# EAGLE board Aquila-2018 (EAGLE 9.1.1), part 1 of 2
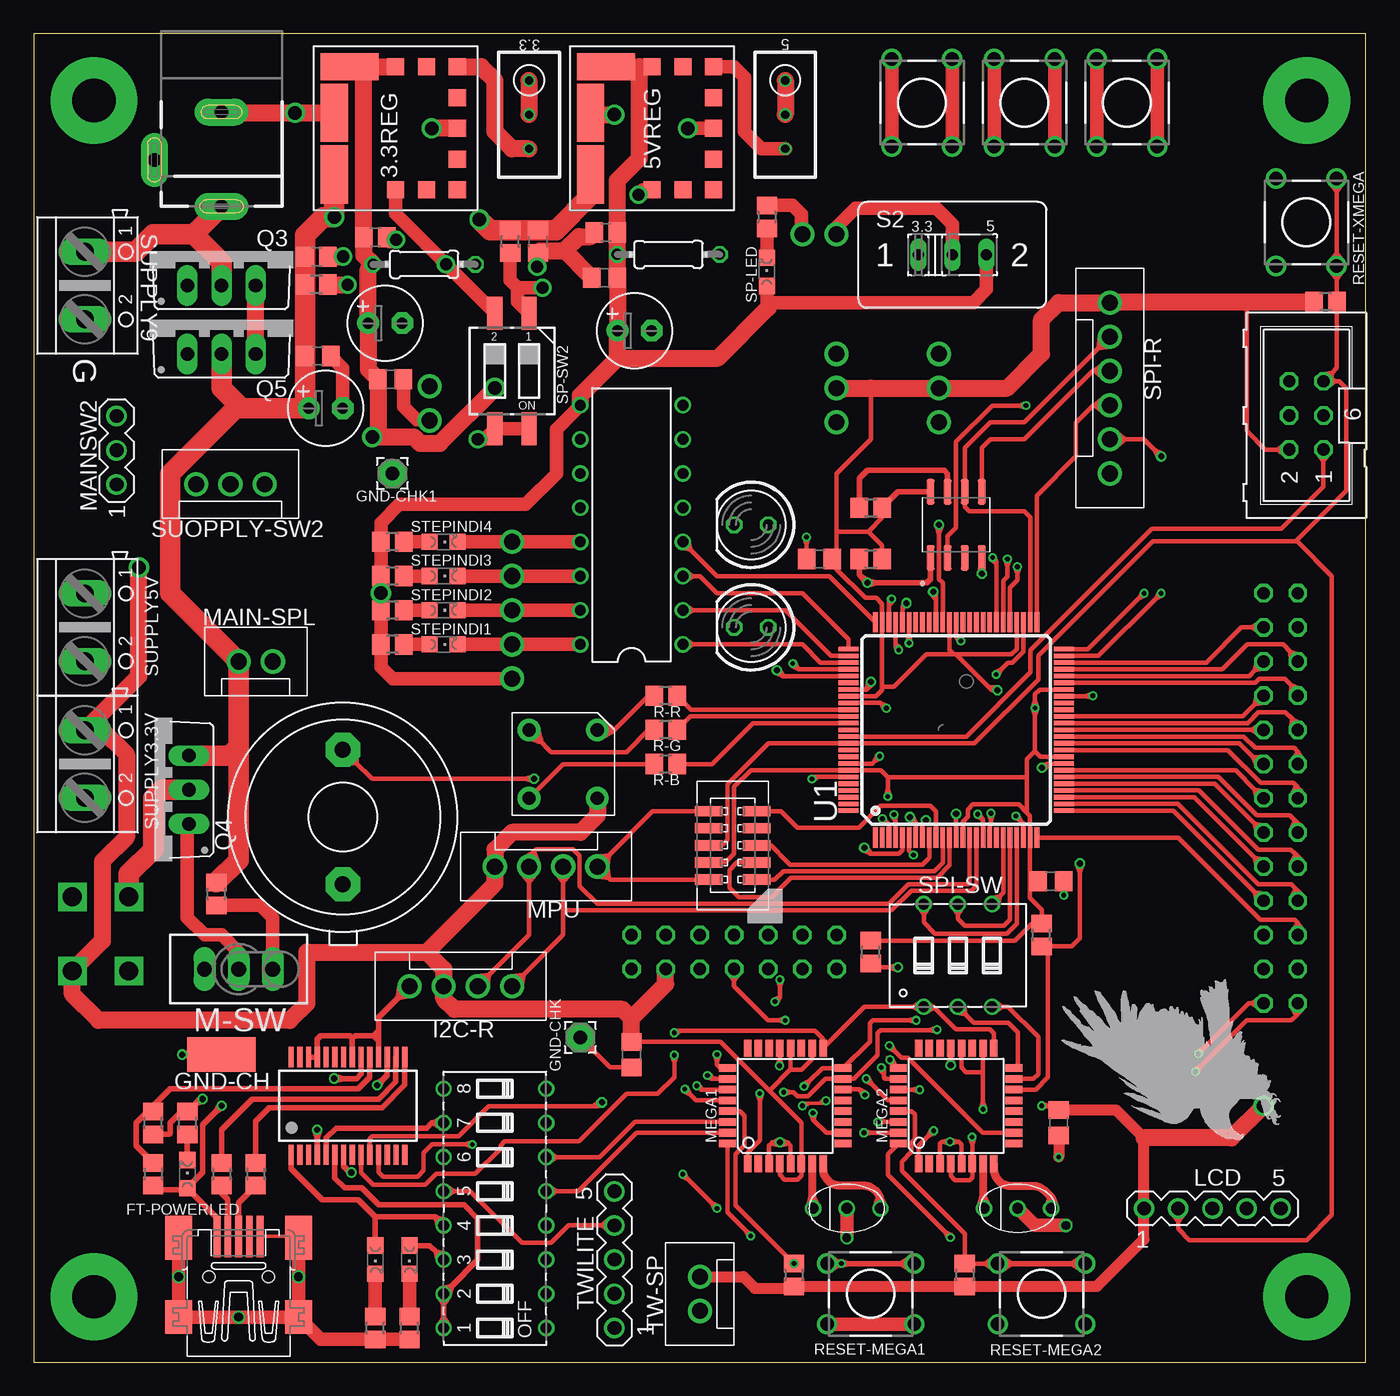
[diagram p0: board, top side]
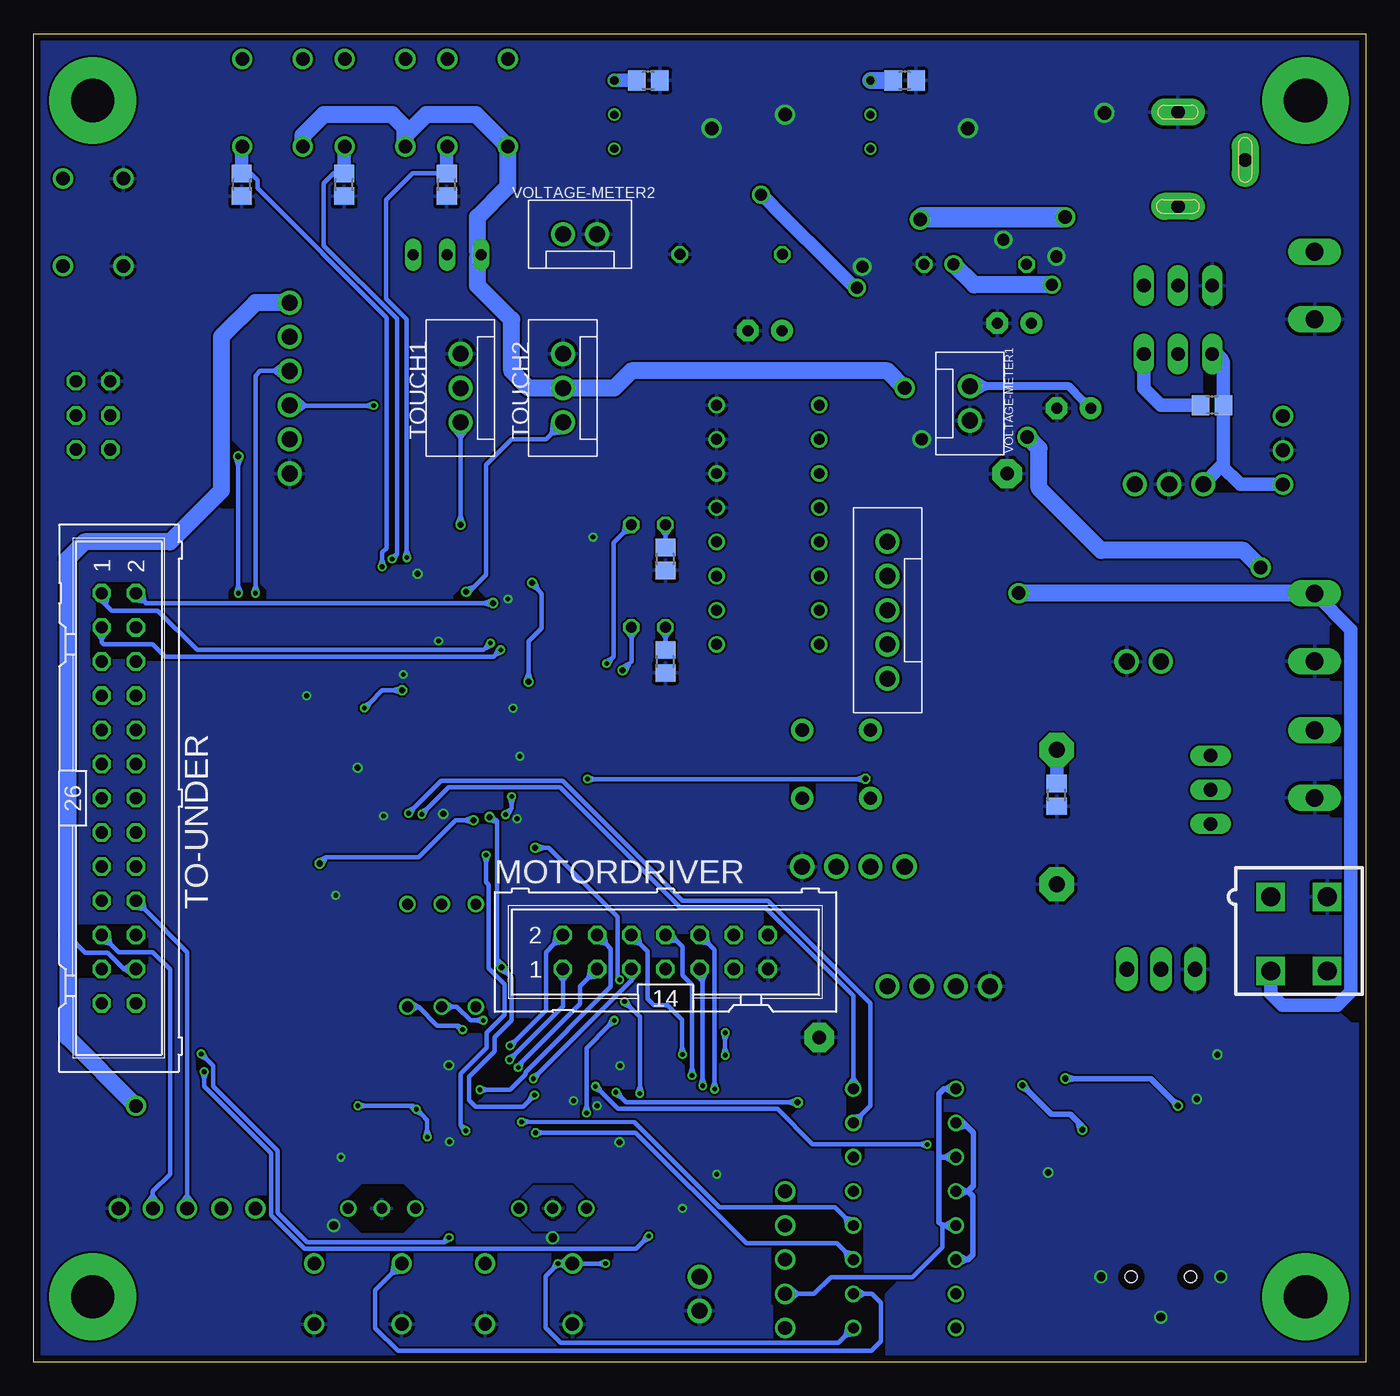
[diagram p1: board, bottom side, seen from below]

Size 99.04 x 98.73 mm. Coordinates in mm from the lower left corner, seen from the top.
Outline: 0,0 99.04,0 99.04,98.73 0,98.73 0,0
Copper layers (1*16): Top 0.035mm / dielectric 1.6mm / Bottom 0.035mm
Design rules "Elecrow_2-layer_PCB_eagle_rule": minimum track width 6mil, minimum drill 12mil, track to track 6mil, track to pad 6mil, pad to pad 6mil, via to via 8mil, smd to smd 0mil, copper to edge 20mil, drill to drill 10mil, minimum pad ring 6mil, minimum via ring 6mil, stop-mask expansion 0mil, vias tented up to drill 100mil, thermal gap 10mil
bRestrict: area 29.9,9.5 to 31.4,17.8; 243 lines

## Footprints (pad centres in the part's own frame; a part is rotated, then mirrored left to right if it is on the bottom)
E2,5-6 = drill 0.813 pad 1.6: + -1.27,0 | drill 0.813 pad 1.6 octagon: - 1.27,0
C0805 = smd 1.3 x 1.5: 1 -0.95,0; 2 0.95,0
OKL-T/3-W5 = smd 1.27 x 1.27: 1 -10.67,6.1; 5 -1.52,6.1; 6 -1.52,1.52; 7 -6.09,1.52; 8 -8.38,1.52; 9 -10.67,1.52; 10 -10.67,3.81; 11 -1.52,3.81; 12 -3.81,1.52 | smd 4.32 x 2.03: 2 -9.53,10.67; 3 -4.95,10.67 | smd 2.03 x 4.32: 4 -1.52,9.53
C2012 = smd 1.3 x 1.5: 1 -0.85,0; 2 0.85,0
OSTA71A1D-A = drill 1 pad 1.676: ANODE 2.54,2.54; BLUE 2.54,-2.54; GREEN -2.54,-2.54; RED -2.54,2.54
R0805 = smd 1.3 x 1.5: 1 -0.85,0; 2 0.85,0
32005-201 = smd 3.1 x 0.5: 1 3,1.6; 2 3,0.8; 3 3,0; 4 3,-0.8; 5 3,-1.6 | smd 2.5 x 2: M1 -3,-4.45; M2 -3,4.45 | smd 3.3 x 2: M3 2.9,4.45; M4 2.9,-4.45 | hole 0.9: 0,2.2; 0,-2.2
CHIPLED_0805 = smd 1.2 x 1.2: A 0,-1.05; C 0,1.05
SMD2,54-5,08 = smd 2.54 x 5.08: 1 0,0
2,15/1,0 = drill 1.016 pad 2.159 octagon: 1 0,0
CON4 = drill 1.2: P$1 -3.81,0; P$2 -1.27,0; P$3 1.27,0; P$4 3.81,0
SSOP28 = smd 0.4 x 1.5: 1 -4.225,-3.625; 2 -3.575,-3.625; 3 -2.925,-3.625; 4 -2.275,-3.625; 5 -1.625,-3.625; 6 -0.975,-3.625; 7 -0.325,-3.625; 8 0.325,-3.625; 9 0.975,-3.625; 10 1.625,-3.625; 11 2.275,-3.625; 12 2.925,-3.625; 13 3.575,-3.625; 14 4.225,-3.625; 15 4.225,3.625; 16 3.575,3.625; 17 2.925,3.625; 18 2.275,3.625; 19 1.625,3.625; 20 0.975,3.625; 21 0.325,3.625; 22 -0.325,3.625; 23 -0.975,3.625; 24 -1.625,3.625; 25 -2.275,3.625; 26 -2.925,3.625; 27 -3.575,3.625; 28 -4.225,3.625
DIL16 = drill 0.813: 1 -8.89,-3.81; 2 -6.35,-3.81; 3 -3.81,-3.81; 4 -1.27,-3.81; 5 1.27,-3.81; 6 3.81,-3.81; 7 6.35,-3.81; 8 8.89,-3.81; 9 8.89,3.81; 10 6.35,3.81; 11 3.81,3.81; 12 1.27,3.81; 13 -1.27,3.81; 14 -3.81,3.81; 15 -6.35,3.81; 16 -8.89,3.81
CON5 = drill 1.2: P$1 -5.08,0; P$2 -2.54,0; P$3 0,0; P$4 2.54,0; P$5 5.08,0
20021221-00010C4LF = smd 0.76 x 2.05: 1 -2.54,-1.78; 2 -2.54,1.78; 3 -1.27,-1.78; 4 -1.27,1.78; 5 0,-1.78; 6 0,1.78; 7 1.27,-1.78; 8 1.27,1.78; 9 2.54,-1.78; 10 2.54,1.78
LED5MM = drill 0.813 octagon: A -1.27,0; K 1.27,0
MA05-1 = drill 1.016: 1 -5.08,0; 2 -2.54,0; 3 0,0; 4 2.54,0; 5 5.08,0
TL3XPO = drill 1.1 pad 1.422 long: 1 -2.54,0; 2 0,0; 3 2.54,0
CON2 = drill 1.2: P$1 -1.27,0; P$2 1.27,0
MA03-1 = drill 1.016: 1 -2.54,0; 2 0,0; 3 2.54,0
TQFP32-08 = smd 1.27 x 0.559: 1 -4.293,2.8; 2 -4.293,2; 3 -4.293,1.2; 4 -4.293,0.4; 5 -4.293,-0.4; 6 -4.293,-1.2; 7 -4.293,-2; 8 -4.293,-2.8; 17 4.293,-2.8; 18 4.293,-2; 19 4.293,-1.2; 20 4.293,-0.4; 21 4.293,0.4; 22 4.293,1.2; 23 4.293,2; 24 4.293,2.8 | smd 0.559 x 1.27: 9 -2.8,-4.293; 10 -2,-4.293; 11 -1.2,-4.293; 12 -0.4,-4.293; 13 0.4,-4.293; 14 1.2,-4.293; 15 2,-4.293; 16 2.8,-4.293; 25 2.8,4.293; 26 2,4.293; 27 1.2,4.293; 28 0.4,4.293; 29 -0.4,4.293; 30 -1.2,4.293; 31 -2,4.293; 32 -2.8,4.293
ML14 = drill 0.914 octagon: 1 -7.62,-1.27; 2 -7.62,1.27; 3 -5.08,-1.27; 4 -5.08,1.27; 5 -2.54,-1.27; 6 -2.54,1.27; 7 0,-1.27; 8 0,1.27; 9 2.54,-1.27; 10 2.54,1.27; 11 5.08,-1.27; 12 5.08,1.27; 13 7.62,-1.27; 14 7.62,1.27
CSTLS_X = drill 0.813: 1 -2.5,0; 2 0,0; 3 2.5,0
TO220BV = drill 1.016 long: D 0,-2.54; G -2.54,-2.54; S 2.54,-2.54
0204/7 = drill 0.813 octagon: 1 -3.81,0; 2 3.81,0
DTS-6 = drill 1: 1 -3.25,2.25; 2 3.25,2.25; 3 -3.25,-2.25; 4 3.25,-2.25
DIP08S = drill 0.813: 1 -8.89,-3.81; 2 -6.35,-3.81; 3 -3.81,-3.81; 4 -1.27,-3.81; 5 1.27,-3.81; 6 3.81,-3.81; 7 6.35,-3.81; 8 8.89,-3.81; 9 8.89,3.81; 10 6.35,3.81; 11 3.81,3.81; 12 1.27,3.81; 13 -1.27,3.81; 14 -3.81,3.81; 15 -6.35,3.81; 16 -8.89,3.81
M251 = drill 0.813 long: 1 -2.54,0; 2 0,0; 3 2.54,0
F/EE17P = drill 1.194 pad 2.54 octagon: 1 -5.004,0; 2 5.004,0
RTRIM3296W = drill 0.61: 1 0,-2.54; 2 0,0; 3 0,2.54
CTS-219-02 = smd 1.13 x 2.44: 1 -1.27,-4.3; 2 1.27,-4.3; 3 1.27,4.3; 4 -1.27,4.3
CON6 = drill 1.2: P$1 -6.35,0; P$2 -3.81,0; P$3 -1.27,0; P$4 1.27,0; P$5 3.81,0; P$6 6.35,0
DIP03YL = drill 0.813: 1 -2.54,-3.81; 2 0,-3.81; 3 2.54,-3.81; 4 2.54,3.81; 5 0,3.81; 6 -2.54,3.81
CON3 = drill 1.2: P$1 -2.54,0; P$2 0,0; P$3 2.54,0
AK500/2 = drill 1.321 long: 1 -2.515,0; 2 2.515,0
ML6 = drill 0.914 octagon: 1 -2.54,-1.27; 2 -2.54,1.27; 3 0,-1.27; 4 0,1.27; 5 2.54,-1.27; 6 2.54,1.27
ML26 = drill 0.914 octagon: 1 -15.24,-1.27; 2 -15.24,1.27; 3 -12.7,-1.27; 4 -12.7,1.27; 5 -10.16,-1.27; 6 -10.16,1.27; 7 -7.62,-1.27; 8 -7.62,1.27; 9 -5.08,-1.27; 10 -5.08,1.27; 11 -2.54,-1.27; 12 -2.54,1.27; 13 0,-1.27; 14 0,1.27; 15 2.54,-1.27; 16 2.54,1.27; 17 5.08,-1.27; 18 5.08,1.27; 19 7.62,-1.27; 20 7.62,1.27; 21 10.16,-1.27; 22 10.16,1.27; 23 12.7,-1.27; 24 12.7,1.27; 25 15.24,-1.27; 26 15.24,1.27
TQFP-100A-100 = smd 1.5 x 0.35: 1 -8,6; 2 -8,5.5; 3 -8,5; 4 -8,4.5; 5 -8,4; 6 -8,3.5; 7 -8,3; 8 -8,2.5; 9 -8,2; 10 -8,1.5; 11 -8,1; 12 -8,0.5; 13 -8,0; 14 -8,-0.5; 15 -8,-1; 16 -8,-1.5; 17 -8,-2; 18 -8,-2.5; 19 -8,-3; 20 -8,-3.5; 21 -8,-4; 22 -8,-4.5; 23 -8,-5; 24 -8,-5.5; 25 -8,-6; 51 8,-6; 52 8,-5.5; 53 8,-5; 54 8,-4.5; 55 8,-4; 56 8,-3.5; 57 8,-3; 58 8,-2.5; 59 8,-2; 60 8,-1.5; 61 8,-1; 62 8,-0.5; 63 8,0; 64 8,0.5; 65 8,1; 66 8,1.5; 67 8,2; 68 8,2.5; 69 8,3; 70 8,3.5; 71 8,4; 72 8,4.5; 73 8,5; 74 8,5.5; 75 8,6 | smd 0.35 x 1.5: 26 -6,-8; 27 -5.5,-8; 28 -5,-8; 29 -4.5,-8; 30 -4,-8; 31 -3.5,-8; 32 -3,-8; 33 -2.5,-8; 34 -2,-8; 35 -1.5,-8; 36 -1,-8; 37 -0.5,-8; 38 0,-8; 39 0.5,-8; 40 1,-8; 41 1.5,-8; 42 2,-8; 43 2.5,-8; 44 3,-8; 45 3.5,-8; 46 4,-8; 47 4.5,-8; 48 5,-8; 49 5.5,-8; 50 6,-8; 76 6,8; 77 5.5,8; 78 5,8; 79 4.5,8; 80 4,8; 81 3.5,8; 82 3,8; 83 2.5,8; 84 2,8; 85 1.5,8; 86 1,8; 87 0.5,8; 88 0,8; 89 -0.5,8; 90 -1,8; 91 -1.5,8; 92 -2,8; 93 -2.5,8; 94 -3,8; 95 -3.5,8; 96 -4,8; 97 -4.5,8; 98 -5,8; 99 -5.5,8; 100 -6,8
SOIC127P600X175-8N = smd 1.91 x 0.6: 1 -2.46,1.905; 2 -2.46,0.635; 3 -2.46,-0.635; 4 -2.46,-1.905; 5 2.46,-1.905; 6 2.46,-0.635; 7 2.46,0.635; 8 2.46,1.905
5566-04A = drill 1.4 square: 1 2.1,-2.75; 2 -2.1,-2.75; 3 2.1,2.75; 4 -2.1,2.75
MJ-179P = drill 1 pad 2 long: 1 3,0; 2 -4,0; 3 -0.45,-5

## Placement (x,y rotation side)
3.3C1  100u  [E2,5-6]  26.14,77.22 0 top
3.3C2  0.1u  [C0805]  26.54,73.05 0 top
3.3REG  OKL-T_6-W12N-C  [OKL-T/3-W5]  33.02,97.79 90 top
5C1  100u  [E2,5-6]  44.68,76.66 0 top
5C2  0.1u  [C0805]  42.44,80.59 180 top
5VREG  OKL-T_6-W12N-C  [OKL-T/3-W5]  52.07,97.79 90 top
9C1  100u  [E2,5-6]  21.72,70.89 0 top
9C2  0.1u  [C0805]  21.13,74.78 0 top
C1  22uF25V  [C2012]  37.49,83.29 270 top
C2  10uF10V  [C2012]  42.55,83.95 180 top
C3  22uF25V  [C2012]  21.03,82.14 0 top
C4  10uF10V  [C2012]  25.4,83.59 0 top
CHECKLED  OSTA71A1D-A  [OSTA71A1D-A]  39.37,44.45 270 top
ERROR1-R  330  [R0805]  52.07,59.69 90 bottom
ERROR2-R  330  [R0805]  52.07,52.07 90 bottom
FT232-R8  330  [R0805]  25.4,2.54 90 top
FT232-R9  330  [R0805]  27.94,2.54 90 top
FT232-R10  4.7K  [R0805]  8.89,13.97 270 top
FT232-R11  10K  [R0805]  8.89,17.78 90 top
FT232-R12  1K  [R0805]  11.43,17.78 270 top
FT232-R13  23  [R0805]  16.51,13.97 270 top
FT232-R14  23  [R0805]  13.97,13.97 270 top
FT232USBCON  Wrie-USB  [32005-201]  15.24,6.35 90 top
FT-POWERLED  [CHIPLED_0805]  11.43,13.97 0 top
GND-CH  [SMD2,54-5,08]  13.97,22.86 90 top
GND-CHK  [2,15/1,0]  40.64,24.13 0 top
GND-CHK1  [2,15/1,0]  26.67,66.04 0 top
I2C-R  XH-4  [CON4]  31.75,27.94 180 top
IC1  FT232RL  [SSOP28]  23.37,19.05 0 top
IC2  ULN2003AN  [DIL16]  44.45,62.23 90 top
INDILED1  330  [R0805]  26.67,53.34 180 top
INDILED2  330  [R0805]  26.67,55.88 180 top
INDILED3  330  [R0805]  26.67,58.42 180 top
INDILED4  330  [R0805]  26.67,60.96 180 top
J1  XH-5  [CON5]  35.56,55.88 90 bottom
JTAG  [20021221-00010C4LF]  51.97,38.4 90 top
L3  E1  [LED5MM]  53.34,62.23 180 top
L4  E2  [LED5MM]  53.34,54.61 180 top
L5  RXDLED  [CHIPLED_0805]  27.94,7.62 180 top
L6  TXDLED  [CHIPLED_0805]  25.4,7.62 180 top
LCD  C2  [MA05-1]  87.63,11.43 0 top
M1-R1  4.7K  [R0805]  56.52,6.48 270 top
M2-R1  4.7K  [R0805]  69.22,6.48 270 top
M-SW  TL36PO  [TL3XPO]  15.24,29.21 180 top
MAIN-SPL  XH-2  [CON2]  16.51,52.07 0 top
MAINSW2  [MA03-1]  6.17,67.77 90 top
MEGA1  [TQFP32-08]  55.88,19.05 90 top
MEGA1-C1  0.1u  [C0805]  44.45,22.86 270 top
MEGA2  [TQFP32-08]  68.58,19.05 90 top
MEGA2-C1  0.1u  [C0805]  76.2,17.78 90 top
MOTORDRIVER  [ML14]  52.07,30.48 0 bottom
MPU  XH-4  [CON4]  38.1,36.83 180 top
Q1  20MHz  [CSTLS_X]  60.45,11.43 0 top
Q2  20MHz  [CSTLS_X]  73.15,11.43 0 top
Q3  IRF9530  [TO220BV]  13.97,82.55 0 top
Q4  IRF9530  [TO220BV]  9.02,42.54 90 top
Q5  IRF9530  [TO220BV]  13.97,77.47 0 top
R1  1.2k  [0204/7]  47.19,82.32 0 top
R2  1.2k  [0204/7]  29.03,81.58 0 top
R-B  ?  [R0805]  46.99,44.45 180 top
R-G  ?  [R0805]  46.99,46.99 180 top
R-R  ?  [R0805]  46.99,49.53 180 top
RESET-MEGA1  R-1  [DTS-6]  62.23,5.08 0 top
RESET-MEGA2  R-2  [DTS-6]  74.93,5.08 0 top
RESET-XMEGA  DTS-6  [DTS-6]  94.61,84.71 270 top
S1  [DIP08S]  34.29,11.43 90 top
S2  [M251]  68.3,82.3 0 top
SG1  F/EE17P  [F/EE17P]  22.99,40.51 270 top
SL-R1  1K  [R0805]  54.51,85.12 270 top
SP-LED  [CHIPLED_0805]  54.51,81.03 0 top
SP-R1  1.2k  [R0805]  53.34,95.25 180 bottom
SP-R2  20K  [R0805]  35.43,83.29 90 top
SP-R3  1.2k  [R0805]  34.29,95.25 180 bottom
SP-R4  20K  [R0805]  21.03,80.09 180 top
SP-R5  4.7K  [R0805]  13.59,34.8 90 top
SP-R6  4.7K  [R0805]  11.43,71.12 180 bottom
SP-RC1  20k  [RTRIM3296W]  55.88,92.71 180 top
SP-RC2  20k  [RTRIM3296W]  36.83,92.71 180 top
SP-SW2  219-02  [CTS-219-02]  35.56,73.66 180 top
SPI-R  XH-6  [CON6]  80.01,72.39 270 top
SPI-SW  [DIP03YL]  68.71,30.23 0 top
SRAM-R1  4.7K  [R0805]  62.23,59.69 0 top
SRAM-R2  10k  [R0805]  62.23,63.5 0 top
SS-R1  4.7K  [R0805]  62.23,30.48 90 top
SS-R2  4.7K  [R0805]  74.93,31.75 90 top
STEPINDI1  LED  [CHIPLED_0805]  30.48,53.34 270 top
STEPINDI2  LED  [CHIPLED_0805]  30.48,55.88 270 top
STEPINDI3  LED  [CHIPLED_0805]  30.48,58.42 270 top
STEPINDI4  KED  [CHIPLED_0805]  30.48,60.96 270 top
SUOPPLY-SW2  XH-3  [CON3]  14.63,65.25 0 top
SUPPLY3.3V  MAIN  [AK500/2]  3.81,44.45 270 top
SUPPLY5V  MAIN  [AK500/2]  3.81,54.61 270 top
SUPPLY9  MAIN  [AK500/2]  3.81,80.01 270 top
SV1  [ML6]  94.61,70.36 90 top
TESTSW-R1  4.7K  [R0805]  83.57,87.5 90 bottom
TESTSW-R2  4.7K  [R0805]  75.95,87.5 90 bottom
TESTSW-R3  4.7K  [R0805]  68.33,87.5 90 bottom
TO-UNDER  [ML26]  92.71,41.91 270 bottom
TOUCH1  XH-3  [CON3]  67.31,72.39 90 bottom
TOUCH2  XH-3  [CON3]  59.69,72.39 90 bottom
TW-SP  XH-2  [CON2]  49.53,5.08 90 top
TWILITE  C2  [MA05-1]  43.18,7.62 90 top
U1  [TQFP-100A-100]  68.58,46.99 90 top
U2  23K256-I/SN  [SOIC127P600X175-8N]  68.58,62.23 90 top
U$1  [EAGLE-PLC-12MM]  92.71,16.51 90 top
U$2  5566-04A  [5566-04A]  4.98,31.83 180 bottom
VOLTAGE-METER1  XH-2  [CON2]  29.44,71.25 270 bottom
VOLTAGE-METER2  XH-2  [CON2]  58.42,83.82 0 bottom
X2  DCJACK-MJ179P  [MJ-179P]  13.97,88.9 270 top
X-R1  4.7K  [R0805]  96.04,78.79 180 top
X-R2  4.7K  [R0805]  22.99,42.16 90 bottom
XMEGA-C1  0.1u  [C0805]  75.62,35.74 0 top
XMEGA-C2  0.1u  [C0805]  58.42,59.69 180 top
XMEGA-TEST1  SW1  [DTS-6]  81.28,93.6 90 top
XMEGA-TEST2  SW2  [DTS-6]  73.66,93.6 90 top
XMEGA-TEST3  SW3  [DTS-6]  66.04,93.6 90 top

## Library data of the parts
3.3C1 3.3C2 5C1 5C2 9C1 9C2 = rcl; SPICEPREFIX: B
3.3REG 5VREG = SamacSys_Parts; ARROW_PART_NUMBER: OKL-T/6-W12N-C; ARROW_PRICE/STOCK: https://www.arrow.com/en/products/okl-t6-w12n-c/murata-power-solutions; DESCRIPTION: MURATA POWER SOLUTIONS - OKL-T/6-W12N-C - DC/DC CONVERTER, 30W, ADJ OUTPUT; HEIGHT: mm; MANUFACTURER_NAME: Murata Electronics; MANUFACTURER_PART_NUMBER: OKL-T/6-W12N-C; RS_PART_NUMBER: 1736944P; RS_PRICE/STOCK: http://uk.rs-online.com/web/p/products/1736944P
C1-C4 R1 R2 SP-RC1 SP-RC2 = resistor
CHECKLED = FullColorLed-forprint
ERROR1-R ERROR2-R FT232-R8-FT232-R14 I2C-R INDILED1-INDILED4 J1 M1-R1 M2-R1 MPU R-B R-G R-R SL-R1 SP-R1-SP-R6 SPI-R SRAM-R1 SRAM-R2 SS-R1 SS-R2 TESTSW-R1-TESTSW-R3 TW-SP X-R1 X-R2 = 0@Mylibrary-main1
FT232USBCON = con-cypressindustries; OC_FARNELL: unknown; OC_NEWARK: unknown
FT-POWERLED L5 L6 SP-LED STEPINDI1-STEPINDI4 = led
GND-CH GND-CHK GND-CHK1 = wirepad
IC1 = ftdichip; MPN: FT232RL; OC_FARNELL: 1146032; OC_NEWARK: 91K9918
IC2 = ULN2003A; AVAILABILITY: Unavailable; DESCRIPTION: Trans Darlington NPN 50V 0.5A 16-Pin SOIC; MF: STMicroelectronics; MP: ULN2003A; PACKAGE: DIP-16 Rochester Electronics; PRICE: None
JTAG = fci
L3 L4 = 0led
LCD TWILITE = con-lstb-forprint; OC_FARNELL: unknown; OC_NEWARK: unknown
M-SW S2 = switch
MAIN-SPL RESET-MEGA1 RESET-MEGA2 RESET-XMEGA SUOPPLY-SW2 TOUCH1 TOUCH2 VOLTAGE-METER1 VOLTAGE-METER2 XMEGA-TEST1-XMEGA-TEST3 = forprint
MAINSW2 = 0con-lstb; OC_FARNELL: unknown; OC_NEWARK: unknown
MEGA1 MEGA2 = atmel; MPN: ATMEGA8-16AU; OC_FARNELL: 9171371; OC_NEWARK: 73M8863
MEGA1-C1 MEGA2-C1 XMEGA-C1 XMEGA-C2 = rcl
MOTORDRIVER TO-UNDER = 0con-harting-ml; OC_FARNELL: unknown; OC_NEWARK: unknown
Q1 Q2 = 0Murata-ceralocks-forprint
Q3-Q5 = transistor-power
S1 = switch-dil-forprint; OC_FARNELL: unknown; OC_NEWARK: unknown
SG1 = buzzer; OC_FARNELL: unknown; OC_NEWARK: unknown
SP-SW2 = switch-dil; OC_FARNELL: unknown; OC_NEWARK: unknown
SPI-SW = switch-dil
SUPPLY3.3V SUPPLY5V SUPPLY9 = con-ptr500; OC_FARNELL: unknown; OC_NEWARK: unknown
SV1 = con-harting-ml; OC_FARNELL: unknown; OC_NEWARK: unknown
U1 = atmel-xmega
U2 = 23K256-I_SN; AVAILABILITY: Good; DESCRIPTION: 23K256 Series 2.7 V to 3.6 V 256 kbit SPI Bus Low-Power Serial SRAM - SOIC-8; MF: Microchip; MP: 23K256-I/SN; PACKAGE: SOIC-8 Microchip; PRICE: 1.24 USD
U$1 = logo
U$2 = con-molex
X2 = kamiki-dcjack

## Nets
+3V3: 3.3C1.+ 3.3C2.1 3.3REG.4 3.3REG.5 C4.1 CHECKLED.ANODE I2C-R.P$3 JTAG.4 LCD.1 M1-R1.2 M2-R1.2 MEGA1-C1.1 MEGA1.4 MEGA1.6 MEGA1.18 MEGA1.20 MEGA2-C1.2 MEGA2.4 MEGA2.6 MEGA2.18 MEGA2.20 MOTORDRIVER.11 MPU.P$4 R2.1 S2.1 SPI-R.P$1 SRAM-R1.2 SRAM-R2.2 SS-R1.2 SS-R2.2 SUPPLY3.3V.1 SV1.2 TO-UNDER.24 TOUCH1.P$2 TOUCH2.P$2 TW-SP.P$2 U1.4 U1.14 U1.24 U1.34 U1.44 U1.54 U1.64 U1.74 U1.83 U1.94 U2.8 U$2.4 X-R1.2 XMEGA-C1.1 XMEGA-C2.1 XMEGA-TEST1.1 XMEGA-TEST1.2 XMEGA-TEST2.1 XMEGA-TEST2.2 XMEGA-TEST3.1 XMEGA-TEST3.2
+5V: 5C1.+ 5C2.1 5VREG.4 5VREG.5 C2.1 IC2.9 INDILED1.2 INDILED2.2 INDILED3.2 INDILED4.2 J1.P$1 R1.1 S2.3 SP-LED.A SUPPLY5V.1 U$2.3
+9V: 3.3REG.2 5VREG.2 9C1.+ 9C2.1 C1.1 C3.1 MAIN-SPL.P$1 Q4.S Q5.D SP-R2.2 SP-R4.2 SP-R5.2 VOLTAGE-METER1.P$1
CK: TO-UNDER.6 U1.46
CS: SRAM-R1.1 U1.82 U2.1
DOUT: TO-UNDER.4 U1.48
FT232-RXD: IC1.5 L5.A S1.10 S1.12 S1.14 TWILITE.4
FT232-TXD: IC1.1 L6.A S1.9 S1.11 S1.13 TWILITE.2
FT-POWERLED1: FT232-R12.2 FT-POWERLED.C
FT-RESET: IC1.6 S1.15 S1.16
GATE: TO-UNDER.5 U1.47
GND: 3.3C1.- 3.3C2.2 3.3REG.3 3.3REG.7 5C1.- 5C2.2 5VREG.3 5VREG.7 9C1.- 9C2.2 C1.2 C2.2 C3.2 C4.2 ERROR1-R.1 ERROR2-R.1 FT232-R8.1 FT232-R9.1 FT232-R11.1 FT232-R12.1 FT232USBCON.5 FT232USBCON.M1 FT232USBCON.M2 FT232USBCON.M3 FT232USBCON.M4 GND-CH.1 GND-CHK1.1 GND-CHK.1 I2C-R.P$4 IC1.7 IC1.18 IC1.21 IC1.25 IC1.26 IC2.5 IC2.6 IC2.7 IC2.8 JTAG.2 JTAG.10 LCD.5 M-SW.3 MAIN-SPL.P$2 MAINSW2.2 MEGA1-C1.2 MEGA1.3 MEGA1.5 MEGA1.21 MEGA2-C1.1 MEGA2.3 MEGA2.5 MEGA2.21 MOTORDRIVER.13 MPU.P$1 Q1.2 Q2.2 Q3.G R1.2 R2.2 RESET-MEGA1.3 RESET-MEGA1.4 RESET-MEGA2.3 RESET-MEGA2.4 RESET-XMEGA.3 RESET-XMEGA.4 SG1.2 SL-R1.1 SP-R1.1 SP-R3.1 SP-SW2.3 SP-SW2.4 SPI-R.P$6 SUOPPLY-SW2.P$2 SUPPLY3.3V.2 SUPPLY5V.2 SUPPLY9.2 SV1.6 TESTSW-R1.1 TESTSW-R2.1 TESTSW-R3.1 TOUCH1.P$3 TOUCH2.P$3 TW-SP.P$1 U1.3 U1.13 U1.23 U1.33 U1.43 U1.53 U1.63 U1.73 U1.84 U1.93 U2.4 U$2.2 VOLTAGE-METER1.P$2 VOLTAGE-METER2.P$2 X2.2 X-R2.1 XMEGA-C1.2 XMEGA-C2.2
HOLD: SRAM-R2.1 U2.7
M1CS: MEGA1.25 MOTORDRIVER.6
M1EN: MEGA1.28 MOTORDRIVER.10
M1INA: MEGA1.27 MOTORDRIVER.9
M1INB: MEGA1.26 MOTORDRIVER.8
M1PWM: MEGA1.10 MOTORDRIVER.7
M2CS: MEGA2.25 MOTORDRIVER.1
M2EN: MEGA2.28 MOTORDRIVER.5
M2INA: MEGA2.27 MOTORDRIVER.4
M2INB: MEGA2.26 MOTORDRIVER.3
M2PWM: MEGA2.10 MOTORDRIVER.2
MISO-M: IC1.11 MEGA1.16 MEGA2.16 SPI-SW.2
MISO-X: SPI-SW.5 U1.21
MISOD: TO-UNDER.15 U1.31
MISOF: SPI-R.P$4 U1.51 U2.2
MOSI-M: IC1.10 MEGA1.15 MEGA2.15 SPI-SW.3
MOSI-X: SPI-SW.4 U1.20
MOSID: TO-UNDER.16 U1.30
MOSIF: SPI-R.P$3 U1.50 U2.5
MV1: TO-UNDER.19 U1.27
MV2: TO-UNDER.18 U1.28
MV3: TO-UNDER.17 U1.29
MVS1: TO-UNDER.1 U1.70
MVS2: TO-UNDER.2 U1.71
MVS3: TO-UNDER.3 U1.72
N$1: IC2.4 U1.75
N$2: U1.58
N$3: SP-R1.2 SP-RC1.1 SP-RC1.2
N$4: IC2.3 U1.76
N$5: Q3.S Q5.S SP-R6.2
N$6: Q4.D U$2.1
N$7: SP-R3.2 SP-RC2.1 SP-RC2.2
N$8: M-SW.2 Q4.G
N$9: 5VREG.6 SP-RC1.3
N$10: M-SW.1 SP-R5.1
N$11: S2.2 VOLTAGE-METER2.P$1
N$12: IC2.2 U1.77
N$13: 3.3REG.6 SP-RC2.3
N$14: IC2.1 U1.78
N$15: 3.3REG.1 SP-R4.1 SP-SW2.2
N$16: IC2.16 J1.P$2 STEPINDI1.C
N$17: IC2.15 J1.P$3 STEPINDI2.C
N$18: IC2.14 J1.P$4 STEPINDI3.C
N$19: IC2.13 J1.P$5 STEPINDI4.C
N$20: INDILED4.1 STEPINDI4.A
N$21: INDILED3.1 STEPINDI3.A
N$22: INDILED2.1 STEPINDI2.A
N$23: INDILED1.1 STEPINDI1.A
N$24: SL-R1.2 SP-LED.C
N$26: 5VREG.1 SP-R2.1 SP-SW2.1
N$31: MEGA2.7 Q2.1
N$33: MEGA2.8 Q2.3
N$36: MEGA1.7 Q1.1
N$37: MEGA1.8 Q1.3
N$38: Q3.D SUPPLY9.1 X2.1
N$40: MAINSW2.1 Q5.G SP-R6.1 SUOPPLY-SW2.P$1
N$42: FT232-R9.2 L5.C
N$43: FT232-R8.2 L6.C
N$44: FT232-R14.2 FT232USBCON.2
N$45: FT232-R10.2 FT232USBCON.1 FT-POWERLED.A IC1.20
N$46: ERROR1-R.2 L3.K
N$47: ERROR2-R.2 L4.K
N$48: FT232-R10.1 FT232-R11.2 IC1.19
N$49: FT232-R13.2 FT232USBCON.3
N$50: FT232-R13.1 IC1.15
N$51: FT232-R14.1 IC1.16
N$55: IC1.4 IC1.17
N$56: CHECKLED.RED R-R.2
N$57: CHECKLED.GREEN R-G.2
N$58: CHECKLED.BLUE R-B.2
N$64: SV1.1 U1.89
PA0: SG1.1 U1.95 X-R2.2
PH0: TESTSW-R1.2 U1.55 XMEGA-TEST1.3 XMEGA-TEST1.4
PH1: TESTSW-R2.2 U1.56 XMEGA-TEST2.3 XMEGA-TEST2.4
PH2: TESTSW-R3.2 U1.57 XMEGA-TEST3.3 XMEGA-TEST3.4
PING1: TO-UNDER.13 U1.35
PING2: TO-UNDER.12 U1.36
PING3: TO-UNDER.11 U1.37
PING4: TO-UNDER.10 U1.38
PING5: TO-UNDER.9 U1.39
PING6: TO-UNDER.8 U1.40
PJ0: TOUCH1.P$1 U1.65
PJ1: TOUCH2.P$1 U1.66
PK4: L3.A U1.79
PK5: L4.A U1.80
PQ0: R-R.1 U1.85
PQ1: R-G.1 U1.86
PQ2: R-B.1 U1.87
RANGE: TO-UNDER.7 U1.45
RESET-M1: M1-R1.1 MEGA1.29 RESET-MEGA1.1 RESET-MEGA1.2 S1.1
RESET-M2: M2-R1.1 MEGA2.29 RESET-MEGA2.1 RESET-MEGA2.2 S1.2
RO1: MEGA1.32 TO-UNDER.25
RO2: MEGA2.32 TO-UNDER.26
RXDM1: MEGA1.30 S1.6
RXDM2: MEGA2.30 S1.4
RXDX1: S1.8 U1.17
SCK-M: IC1.9 MEGA1.17 MEGA2.17 SPI-SW.1
SCK-X: SPI-SW.6 U1.22
SCKD: TO-UNDER.14 U1.32
SCKF: SPI-R.P$2 U1.52 U2.6
SCL-C: I2C-R.P$1 MPU.P$2 U1.16
SCL-D: LCD.3 TO-UNDER.20 U1.26
SDA-C: I2C-R.P$2 MPU.P$3 U1.15
SDA-D: LCD.4 TO-UNDER.21 U1.25
SIG1: MEGA1.1 U1.5
SIG2: MEGA2.1 U1.6
SS1: MEGA1.14 SS-R1.1 U1.7
SS2: MEGA2.14 SS-R2.1 U1.8
SS-R: SPI-R.P$5 U1.49
TCK: JTAG.1 U1.11
TDI: JTAG.9 U1.10
TDO: JTAG.3 U1.12
TMS: JTAG.5 U1.9
TXDM1: MEGA1.31 S1.5
TXDM2: MEGA2.31 S1.3
TXDX1: S1.7 U1.18
X-RESET: JTAG.6 LCD.2 RESET-XMEGA.1 RESET-XMEGA.2 SV1.5 U1.90 X-R1.1

## Tracks (layer width: path | path; a pad name or v marks a point on that pad's centre or on a via)
+3V3  (via drill 0.35, 0.45, 1)
  Top 0.152: XMEGA-C1.1 74.13,35.74 74.08,35.79
  Top 0.33: 63.08,50.19 U1.74 63.08,56.38 62.66,56.79 61.82,56.79 59.69,58.93 59.69,59.69 | 63.08,50.19 63.08,49.95 62.62,49.49 U1.83 | U1.14 69.08,40.17 69.44,40.54 69.44,41.07 69.83,41.45 73.23,41.45 73.85,40.83 | 73.85,40.83 74.08,40.6 U1.24 74.08,35.79 74.08,34.5 74.95,33.63 74.95,32.68 74.88,32.6 | U1.44 74.81,49.99 74.45,49.63 74.45,49.14 | 74.45,49.14 v74.45,48.62 | v74.45,48.62 74.45,48.09 | 74.45,48.09 74.45,45.39 | U1.34 74.85,44.99 74.45,45.39 | U1.54 73.08,52.99 72.69,52.6 68.58,52.6 | 68.58,52.6 68.43,52.6 | U1.64 68.08,52.95 68.43,52.6 | 62.23,72.39 62.23,68.58 59.69,66.04 59.69,61.72 | MEGA1.4 55.48,13.91 55.83,13.56 56.79,13.56 57.08,13.85 MEGA1.6 57.08,17.8 54.66,20.22 | MEGA1-C1.1 51.07,23.81 54.66,20.22 | MEGA2.4 68.18,13.84 68.5,13.51 69.62,13.51 69.8,13.69 69.8,14.74 MEGA2.6 69.77,16.21 | MEGA2.18 70.58,21.49 | 70.58,21.49 70.58,19.32 | 70.58,19.32 v70.58,18.8 v70.59,18.8 | v69.77,16.74 69.77,16.21 | v74.93,19.05 75.45,19.05 | 75.45,19.05 75.88,19.05 MEGA2-C1.2 | SS-R1.2 72.94,31.33 74.2,32.6 74.88,32.6 | 74.88,32.6 SS-R2.2 | 68.43,52.6 66.37,52.6 63.96,50.19 63.08,50.19 | 73.85,40.83 73.85,43.54 | 73.85,43.54 73.85,44.79 74.45,45.39 | 68.58,52.6 71.02,50.16 | 71.02,50.16 71.25,49.94 v71.65,49.94 | 59.69,59.69 XMEGA-C2.1 | MEGA1.18 57.88,22.5 57.1,21.72 56.24,21.72 | 56.24,21.72 54.74,20.22 54.66,20.22 | U1.4 64.08,40.18 | 64.08,40.18 64.08,40.57 v63.96,40.69 | v63.5,42.04 63.5,42.56 | 63.5,42.56 63.5,43.48 | 63.5,43.48 62.99,43.99 U1.94 53.31,43.99 52.07,42.75 52.07,37.77 51.44,37.13 JTAG.4 | MEGA1.20 56.28,21.76 56.24,21.72 | MEGA2.20 68.98,21.9 69.32,21.57 70.5,21.57 70.58,21.49
  Top 0.33: 59.69,61.72 59.69,59.69 | SRAM-R1.2 63.08,60.69 62.05,61.72 | 62.05,61.72 59.69,61.72 | SRAM-R2.2 63.08,62.75 62.05,61.72 | 63.5,43.48 73.8,43.48 73.85,43.54 | 90.17,78.79 90.17,69.22 91.57,67.82 92.43,67.82 | 92.43,67.82 SV1.2 | 70.58,19.32 70.43,18.84 v70.59,18.8 | 70.58,19.32 70.74,18.85 v70.59,18.8 | 69.77,16.21 69.93,16.69 v69.77,16.74 | 69.77,16.21 69.62,16.69 v69.77,16.74 | 75.45,19.05 74.98,19.2 v74.93,19.05 | 75.45,19.05 74.98,18.9 v74.93,19.05 | 71.02,50.16 71.52,49.77 v71.65,49.94 | 71.02,50.16 71.66,50.15 v71.65,49.94 | 74.45,49.14 74.29,48.67 v74.45,48.62 | 74.45,49.14 74.6,48.67 v74.45,48.62 | 74.45,48.09 74.6,48.56 v74.45,48.62 | 74.45,48.09 74.29,48.56 v74.45,48.62 | 64.08,40.18 64.12,40.68 v63.96,40.69 | 64.08,40.18 63.82,40.61 v63.96,40.69 | 63.5,42.56 63.35,42.09 v63.5,42.04 | 63.5,42.56 63.65,42.09 v63.5,42.04 | 92.43,67.82 93.05,67.39 SV1.2 | 92.43,67.82 93.05,68.25 SV1.2
  Top 0.406: SRAM-R2.2 64.27,64.69 U2.8
  Top 0.813: TW-SP.P$2 52.76,6.35 53.62,5.49 56.37,5.49 M1-R1.2 M2-R1.2 79.06,5.63 82.55,9.12 LCD.1 82.55,16.66 80.48,18.73 MEGA2-C1.2
  Top 1.016: XMEGA-TEST3.2 XMEGA-TEST3.1 | XMEGA-TEST2.2 XMEGA-TEST2.1 | XMEGA-TEST1.1 XMEGA-TEST1.2
  Top 1.27: 29.21,30.48 20.32,30.48 20.32,26.67 19.05,25.4 4.83,25.4 2.88,27.35 U$2.4 5.11,31.3 5.11,37.21 6.91,39.01 6.91,45.16 5.11,46.96 SUPPLY3.3V.1 7.82,50.98 v7.82,59.05 | 29.21,30.48 30.48,29.21 I2C-R.P$3 30.48,27.03 31.29,26.21 43.79,26.21 44.45,25.55 | 29.21,30.48 34.29,35.56 MPU.P$4 34.29,38.1 35.56,39.37 40.64,39.37 41.91,40.64 CHECKLED.ANODE | TOUCH2.P$2 62.23,72.39 TOUCH1.P$2 72.39,72.39 74.93,74.93 74.93,77.47 76.2,78.74 SPI-R.P$1 80.06,78.79 90.17,78.79 X-R1.2 | MEGA1-C1.1 44.45,25.55 | 44.45,25.55 46.99,28.09 MOTORDRIVER.11 | 3.3REG.4 24.89,96.27 | 24.89,96.27 3.3REG.5 | v34.29,72.39 30.19,68.29 28.74,68.29 28.27,68.76 v25.17,68.76 25.59,69.18 3.3C2.1 24.87,73.78 3.3C1.+ 24.87,81.23 R2.1 24.55,82.26 C4.1 24.55,95.93 24.89,96.27 | v91.44,19.05 89.05,16.66 82.55,16.66
  Bottom 0.33: v70.59,18.8 70.22,18.43 | 70.22,18.43 69.77,17.98 69.77,17.26 | 69.77,17.26 v69.77,16.74 | v70.59,18.8 70.84,19.05 71.05,19.05 | 71.05,19.05 74.41,19.05 | 74.41,19.05 v74.93,19.05 | v71.65,49.94 72.33,49.94 | 72.33,49.94 73.13,49.94 74.08,48.99 | 74.08,48.99 v74.45,48.62 | v63.96,40.69 63.59,41.06 | 63.59,41.06 63.5,41.15 63.5,41.51 | 63.5,41.51 v63.5,42.04 | 96.52,31.75 95.2,30.43 93.55,30.43 92.35,29.23 | TO-UNDER.24 92.33,29.21 92.35,29.23 | 70.22,18.43 70.66,18.65 v70.59,18.8 | 70.22,18.43 70.44,18.87 v70.59,18.8 | 71.05,19.05 70.56,18.96 v70.59,18.8 | 71.05,19.05 70.7,18.68 v70.59,18.8 | 69.77,17.26 69.62,16.79 v69.77,16.74 | 69.77,17.26 69.93,16.79 v69.77,16.74 | 74.41,19.05 74.88,18.9 v74.93,19.05 | 74.41,19.05 74.88,19.2 v74.93,19.05 | 72.33,49.94 71.72,50.14 v71.65,49.94 | 72.33,49.94 71.72,49.73 v71.65,49.94 | 74.08,48.99 74.3,48.54 v74.45,48.62 | 74.08,48.99 74.52,48.76 v74.45,48.62 | 63.59,41.06 63.81,40.62 v63.96,40.69 | 63.59,41.06 64.03,40.83 v63.96,40.69 | 63.5,41.51 63.65,41.99 v63.5,42.04 | 63.5,41.51 63.35,41.99 v63.5,42.04 | 92.35,29.23 91.72,29.65 TO-UNDER.24 | 92.35,29.23 91.75,28.79 TO-UNDER.24
  Bottom 1.27: XMEGA-TEST1.1 79.03,91.15 77.47,92.71 72.39,92.71 71.41,91.73 XMEGA-TEST2.1 71.41,91.15 69.85,92.71 66.15,92.71 XMEGA-TEST3.1 63.79,87.34 66.04,85.09 66.04,82.58 S2.1 66.04,82.02 66.04,80.01 63.5,77.47 63.5,73.66 62.23,72.39 TOUCH2.P$2 55.88,72.39 54.61,73.66 35.56,73.66 v34.29,72.39 | v7.82,59.05 9.09,60.32 19.68,60.32 24.31,64.95 24.31,67.89 v25.17,68.76 | SPI-R.P$1 82.55,78.74 85.09,76.2 85.09,64.77 88.9,60.96 95.25,60.96 96.52,59.69 96.52,31.75 96.52,24.13 v91.44,19.05
+5V  (via drill 1)
  Top 1.016: J1.P$1 26.67,50.8 25.82,51.65 INDILED1.2 INDILED2.2 v25.82,57.15 INDILED3.2 INDILED4.2 25.82,62.4 27.18,63.75 36.58,63.75 38.86,66.04 38.86,69.34 IC2.9 | SP-LED.A 54.51,78.46 54.61,78.36 54.99,78.74 69.85,78.74 70.84,79.73 S2.3
  Top 1.27: 5VREG.4 45.01,96.27 | 45.01,96.27 5VREG.5 | 45.01,96.27 45.01,89.43 43.38,87.81 43.38,83.96 C2.1 43.38,83.94 R1.1 43.38,80.6 5C2.1 43.39,76.67 | 43.39,76.67 5C1.+ | IC2.9 40.64,71.86 43.39,74.61 | 43.39,74.61 43.39,76.67 | 43.39,74.61 50.86,74.61 54.61,78.36
  Bottom 1.016: SUPPLY5V.1 1.12,54.43 1.12,27.53 2.11,26.54 6.22,26.54 7.08,27.4 U$2.3
  Bottom 1.27: SUPPLY5V.1 25.8,57.12 v25.82,57.15
+9V  (via drill 1)
  Top 1.524: 3.3REG.2 v22.35,85.09 21.54,85.09 20.18,83.73 C3.1 SP-R4.2 9C2.1 20.19,74.77 20.19,74.12 20.19,71.15 9C1.+ 15.47,70.89 | SP-R5.2 15.24,37.3 15.24,45.72 | 15.24,45.72 15.24,48.77 MAIN-SPL.P$1 10.16,57.15 10.16,66.04 15.01,70.89 15.47,70.89 | Q5.D 13.97,72.39 15.47,70.89 | v33.15,84.91 33.92,84.14 SP-R2.2 C1.1 38.82,84.14 41.4,86.71 5VREG.2 | Q4.S 14.61,45.08 15.24,45.72
  Bottom 0.61: 9C1.+ 21.02,71.47 | 21.02,71.47 22.07,72.52 28.24,72.52 | 28.24,72.52 VOLTAGE-METER1.P$1 | 28.24,72.52 29.14,72 VOLTAGE-METER1.P$1 | 28.24,72.52 29.14,73.03 VOLTAGE-METER1.P$1 | 21.02,71.47 20.38,71.38 9C1.+ | 21.02,71.47 20.94,70.83 9C1.+
  Bottom 1.524: v22.35,85.09 32.97,85.09 v33.15,84.91
CK
  Top 0.33: U1.46 90.36,50.99 90.79,51.42 | 90.79,51.42 TO-UNDER.6 | 90.79,51.42 91.53,51.56 TO-UNDER.6 | 90.79,51.42 90.93,52.16 TO-UNDER.6
CS  (via drill 0.45)
  Top 0.33: U1.82 61.91,49.99 | 61.91,49.99 61.93,49.99 62.26,50.32 v62.26,50.57 | 61.91,49.99 62.4,50.41 v62.26,50.57 | 61.91,49.99 62.05,50.62 v62.26,50.57
  Top 0.406: SRAM-R1.1 61.38,58.51 61.5,58.39 | 61.5,58.39 v61.98,57.91 | U2.1 66.67,58.17 66.42,57.91 62.65,57.91 | v61.98,57.91 62.65,57.91 | 61.5,58.39 61.83,57.82 v61.98,57.91 | 61.5,58.39 62.06,58.06 v61.98,57.91 | 62.65,57.91 62.02,58.08 v61.98,57.91 | 62.65,57.91 62.02,57.74 v61.98,57.91
  Bottom 0.33: v62.26,50.57 62.26,51.25 | 62.26,51.25 62.26,53.57 61.27,54.56 61.27,57.1 61.55,57.39 | 61.55,57.39 61.98,57.81 v61.98,57.91 | 62.26,51.25 62.05,50.64 v62.26,50.57 | 62.26,51.25 62.46,50.64 v62.26,50.57 | 61.55,57.39 62.09,57.73 v61.98,57.91 | 61.55,57.39 61.78,57.99 v61.98,57.91
DOUT
  Top 0.33: U1.48 87.17,51.99 89.79,54.61 90.53,54.61 | 90.53,54.61 TO-UNDER.4 | 90.53,54.61 91.14,54.18 TO-UNDER.4 | 90.53,54.61 91.14,55.04 TO-UNDER.4
FT232-RXD
  Top 0.33: TWILITE.4 42.16,10.16 | 42.16,10.16 39.75,10.16 38.46,8.87 36.3,8.87 32.46,12.7 31.29,12.7 | 31.29,12.7 S1.12 | 31.29,12.7 30.72,13.07 S1.12 | 31.29,12.7 30.72,12.33 S1.12 | 42.16,10.16 42.83,9.68 TWILITE.4 | 42.16,10.16 42.83,10.64 TWILITE.4
  Top 0.406: S1.14 29.91,8.2 | 29.91,8.2 29.43,8.67 L5.A | S1.10 29.67,17.78 | 29.67,17.78 29.59,17.78 29.21,17.4 22.48,17.4 21.74,16.66 IC1.5 | 29.91,8.2 30.09,7.52 S1.14 | 29.91,8.2 30.59,8.01 S1.14 | 29.67,17.78 30.28,17.43 S1.10 | 29.67,17.78 30.28,18.13 S1.10
  Bottom 0.406: 29.59,12.7 29.21,12.32 29.21,8 29.59,7.62 29.67,7.62 | 29.67,7.62 S1.14 | S1.12 29.67,12.7 | 29.67,12.7 29.59,12.7 | S1.10 29.92,17.78 29.7,17.56 | 29.7,17.56 29.18,17.04 29.18,13.11 29.59,12.7 | 29.67,7.62 30.28,7.27 S1.14 | 29.67,7.62 30.28,7.97 S1.14 | 29.67,12.7 30.28,12.35 S1.12 | 29.67,12.7 30.28,13.05 S1.12 | 29.7,17.56 30.38,17.39 S1.10 | 29.7,17.56 30.19,18.06 S1.10
FT232-TXD
  Top 0.406: IC1.1 19.14,14.38 21.46,12.07 24.13,12.07 25.4,10.79 | 25.4,10.79 L6.A | S1.13 29.91,10.74 | 29.91,10.74 29.84,10.79 25.4,10.79 | 29.91,10.74 30.09,10.05 S1.13 | 29.91,10.74 30.59,10.55 S1.13
  Bottom 0.33: TWILITE.2 42.16,5.08 | 42.16,5.08 41.02,5.08 39.78,6.32 33.71,6.32 31.5,8.53 31.5,10.16 | 42.16,5.08 42.83,4.6 TWILITE.2 | 42.16,5.08 42.83,5.56 TWILITE.2
  Bottom 0.406: S1.13 31.29,10.16 | 31.29,10.16 31.5,10.16 31.75,10.41 31.75,15.24 | 31.29,20.32 31.37,20.32 31.75,19.94 31.75,15.24 | 31.29,20.32 S1.9 | S1.11 31.29,15.24 | 31.29,15.24 31.75,15.24 | 31.29,20.32 30.68,20.67 S1.9 | 31.29,20.32 30.68,19.97 S1.9 | 31.29,15.24 30.68,15.59 S1.11 | 31.29,15.24 30.68,14.89 S1.11 | 31.29,10.16 30.68,10.51 S1.13 | 31.29,10.16 30.68,9.81 S1.13
FT-POWERLED1
  Top 0.406: FT232-R12.2 FT-POWERLED.C
FT-RESET
  Top 0.406: S1.16 30.48,3.35 | 30.48,3.35 30.48,4.27 | 30.48,4.27 S1.15 | S1.15 31.05,5.65 | 31.05,5.65 33.02,7.62 33.02,10.67 32,11.68 25.65,11.68 24.38,12.95 23.11,12.95 22.39,13.68 IC1.6 | 30.48,4.27 30.83,4.88 S1.15 | 30.48,4.27 30.13,4.88 S1.15 | 31.05,5.65 30.38,5.47 S1.15 | 31.05,5.65 30.87,4.97 S1.15 | 30.48,3.35 30.13,2.74 S1.16 | 30.48,3.35 30.83,2.74 S1.16
GATE
  Top 0.33: U1.47 88.37,51.49 90.22,53.34 92.89,53.34 93.43,52.8 | 93.43,52.8 93.98,52.25 TO-UNDER.5 | 93.43,52.8 93.46,52.05 TO-UNDER.5 | 93.43,52.8 94.14,52.56 TO-UNDER.5
GND  (via drill 0.35, 0.45, 0.65, 0.9, 1)
  Top 0.152: XMEGA-C1.2 76.57,35.22 | 76.57,35.22 76.57,34.71 v76.58,34.7 | 76.57,35.22 76.36,34.81 v76.58,34.7 | 76.57,35.22 76.8,34.82 v76.58,34.7
  Top 0.254: FT232USBCON.5 19.59,9.35 FT232USBCON.M4 | v57.15,19.05 57.33,19.23 57.64,19.23 | 57.64,19.23 58.42,19.23 | 58.42,19.23 58.7,19.23 v58.9,19.43 | 57.64,19.23 57.16,19.25 v57.15,19.05 | 57.64,19.23 57.28,18.9 v57.15,19.05 | 58.42,19.23 58.9,19.23 v58.9,19.43 | 58.42,19.23 58.76,19.57 v58.9,19.43
  Top 0.33: U1.84 62.96,48.99 63.01,48.94 | U1.13 v68.58,40.74 | U1.33 75.55,44.49 | 75.55,44.49 75.33,44.49 75.01,44.17 v74.95,44.17 | U1.63 68.58,53.98 | 68.58,53.98 68.58,53.95 v68.94,53.59 | MEGA2.5 68.98,16.19 68.78,16.38 68.65,16.38 | v68.12,16.38 67.6,16.38 | 67.6,16.38 67.54,16.38 67.38,16.22 MEGA2.3 | 68.65,16.38 v68.12,16.38 | MEGA2.21 68.18,22.75 | 68.18,22.75 v68.18,22.08 v68.17,22.07 | MEGA1.5 56.28,16.09 56.14,16.23 | 56.14,16.23 56.03,16.33 v55.47,16.33 | v55.47,16.33 54.89,16.33 54.8,16.25 | MEGA1.3 54.68,16.12 54.8,16.25 | MEGA1.21 55.48,22.55 | 55.48,22.55 55.48,22.05 v55.45,22.02 | U1.53 73.58,52.8 72.75,51.97 72.42,51.97 71.92,51.48 | 71.92,51.48 v71.55,51.1 | GND-CHK.1 41.36,23.41 42.86,21.91 MEGA1-C1.2 | U2.4 70.48,59.27 | 70.48,59.27 v70.48,58.6 | U1.3 63.58,39.98 63.5,40.05 | v63.09,40.39 63.17,40.39 63.5,40.05 | U1.93 62.35,44.49 62.52,44.66 | 62.52,44.66 v62.89,45.03 | U1.43 78.22,49.49 | 78.22,49.49 78.7,49.49 v78.74,49.53 | 63.01,48.94 63.36,48.59 v63.4,48.59 | U1.73 63.58,56.23 | 63.58,56.23 63.58,56.52 v63.78,56.72 | U1.23 73.58,40.03 73.4,40.22 | 73.4,40.22 v73.03,40.59 | v48.26,13.97 48.63,13.6 | 48.63,13.6 50.43,11.8 | 50.43,11.8 v50.8,11.43 | XMEGA-C2.2 57.47,60.79 | 57.47,60.79 57.47,61.3 v57.45,61.32 | MPU.P$1 42.76,35.98 | 42.76,35.98 42.88,35.86 JTAG.2 | JTAG.10 46.02,40.95 42.76,37.68 | 42.76,37.68 MPU.P$1 | 75.55,44.49 74.92,44.38 v74.95,44.17 | 75.55,44.49 75.11,44.02 v74.95,44.17 | 68.58,53.98 68.79,53.53 v68.94,53.59 | 68.58,53.98 69.02,53.73 v68.94,53.59 | 67.6,16.38 68.07,16.23 v68.12,16.38 | 67.6,16.38 68.07,16.54 v68.12,16.38 | 68.65,16.38 68.17,16.54 v68.12,16.38 | 68.65,16.38 68.17,16.23 v68.12,16.38
  Top 0.33: 68.18,22.75 67.97,22.14 v68.17,22.07 | 68.18,22.75 68.38,22.14 v68.17,22.07 | 56.14,16.23 55.57,16.52 v55.47,16.33 | 56.14,16.23 55.51,16.12 v55.47,16.33 | 54.8,16.25 55.43,16.12 v55.47,16.33 | 54.8,16.25 55.38,16.52 v55.47,16.33 | 55.48,22.55 55.3,22.08 v55.45,22.02 | 55.48,22.55 55.6,22.06 v55.45,22.02 | 71.92,51.48 71.48,51.25 v71.55,51.1 | 71.92,51.48 71.7,51.03 v71.55,51.1 | 70.48,59.27 70.28,58.66 v70.48,58.6 | 70.48,59.27 70.69,58.66 v70.48,58.6 | 63.5,40.05 63.23,40.47 v63.09,40.39 | 63.5,40.05 63.03,40.23 v63.09,40.39 | 62.52,44.66 62.96,44.89 v62.89,45.03 | 62.52,44.66 62.75,45.11 v62.89,45.03 | 78.22,49.49 78.7,49.37 v78.74,49.53 | 78.22,49.49 78.68,49.68 v78.74,49.53 | 63.01,48.94 63.26,48.51 v63.4,48.59 | 63.01,48.94 63.46,48.74 v63.4,48.59 | 63.58,56.23 63.9,56.61 v63.78,56.72 | 63.58,56.23 63.62,56.73 v63.78,56.72 | 73.4,40.22 73.17,40.66 v73.03,40.59 | 73.4,40.22 72.95,40.45 v73.03,40.59 | 50.43,11.8 50.66,11.36 v50.8,11.43 | 50.43,11.8 50.87,11.58 v50.8,11.43 | 48.63,13.6 48.41,14.04 v48.26,13.97 | 48.63,13.6 48.19,13.83 v48.26,13.97 | 57.47,60.79 57.61,61.27 v57.45,61.32 | 57.47,60.79 57.3,61.26 v57.45,61.32 | 42.76,35.98 42.64,36.92 MPU.P$1 | 42.76,35.98 41.82,36.1 MPU.P$1 | 42.76,37.68 41.82,37.56 MPU.P$1 | 42.76,37.68 42.64,36.74 MPU.P$1
  Top 0.406: FT232-R11.1 10.07,16.93 10.16,17.02 10.16,17.78 11.01,18.63 FT232-R12.1 12,19.2 | IC1.7 23.04,14.55 23.5,14.1 v23.62,14.1 | 12,19.2 12.36,19.56 v12.57,19.56 | GND-CH.1 11.72,22.86 | 11.72,22.86 v11.05,22.86 | I2C-R.P$4 27.09,27.09 | 27.09,27.09 25.64,25.64 25.64,24.51 | 25.64,24.51 25.64,23.88 | 25.64,23.88 IC1.18 | IC1.26 IC1.25 21.09,24.01 21.34,24.26 23.5,24.26 23.69,24.06 | IC1.21 23.69,24.06 | 23.69,24.06 23.89,24.26 25.26,24.26 | 25.26,24.26 25.64,23.88 | 25.26,24.26 25.52,24.51 25.64,24.51 | 12,19.2 12.62,19.39 v12.57,19.56 | 12,19.2 12.45,19.68 v12.57,19.56 | 11.72,22.86 11.09,23.03 v11.05,22.86 | 11.72,22.86 11.09,22.69 v11.05,22.86 | 27.09,27.09 28.05,27.25 I2C-R.P$4 | 27.09,27.09 27.25,28.05 I2C-R.P$4
  Top 0.66: 41.36,23.41 41.39,24.1 GND-CHK.1 40.67,23.38 41.36,23.41
  Top 0.813: MEGA2-C1.1 v76.2,15.24
  Top 1.016: 5VREG.7 v48.65,91.7 v48.64,91.69 | SP-SW2.4 SP-SW2.3 33.51,68.58 v33.02,68.58 | FT232-R9.1 FT232-R8.1 21.35,1.69 FT232USBCON.M1 | FT232USBCON.M4 v19.69,6.35 FT232USBCON.M1 | FT232USBCON.M3 v10.79,6.35 FT232USBCON.M2 v15.24,3.35 FT232USBCON.M1 | RESET-MEGA1.3 RESET-MEGA1.4 | C1.2 37.49,81.46 v37.44,81.41 | 9C2.2 22.99,73.87 9C1.- | VOLTAGE-METER1.P$2 28.88,69.98 28.81,70.05 28.46,70.05 27.49,71.02 3.3C2.2 | SL-R1.1 56.43,85.97 57.07,85.32 57.07,83.9 VOLTAGE-METER2.P$2 | Q1.2 v60.45,9.25 | Q2.2 74.42,10.16 v76.73,10.16
  Top 1.27: X2.2 14.03,92.84 v19.43,92.84 3.3REG.3 | 5VREG.3 41.4,92.71 v43.18,92.71 | 3.3REG.7 v29.6,91.7 v29.59,91.69 | C2.2 41.4,83.65 40.53,83.65 39.47,82.59 | C1.2 37.64,82.59 39.47,82.59 | 5C2.2 39.5,82.59 39.47,82.59 | C4.2 26.42,83.43 v26.94,83.43 | C3.2 22.99,82.14 v23.01,82.17
  pour Bottom: -1.27,99.06 99.06,99.06 99.06,0 -1.27,0
HOLD
  Top 0.406: U2.7 67.94,66.04 67.69,66.29 61.98,66.29 61.38,65.7 SRAM-R2.1
M1CS  (via drill 0.35)
  Top 0.33: v50.8,22.86 50.8,22.34 | 50.8,22.34 50.8,22.1 51.05,21.85 MEGA1.25 | 50.8,22.34 50.95,22.81 v50.8,22.86 | 50.8,22.34 50.65,22.81 v50.8,22.86
  Bottom 0.33: MOTORDRIVER.6 53.96,31.1 | 53.96,31.1 53.39,30.53 53.39,27.03 52.91,26.54 51.92,26.54 50.83,25.45 50.83,23.38 | v50.8,22.86 50.83,22.89 50.83,23.38 | 50.83,23.38 50.65,22.92 v50.8,22.86 | 50.83,23.38 50.96,22.9 v50.8,22.86 | 53.96,31.1 54.7,31.24 MOTORDRIVER.6 | 53.96,31.1 54.1,31.84 MOTORDRIVER.6
M1EN  (via drill 0.35)
  Top 0.33: v48.41,20.3 48.78,19.92 | 48.78,19.92 49.26,19.45 MEGA1.28 | 48.78,19.92 48.56,20.37 v48.41,20.3 | 48.78,19.92 48.34,20.15 v48.41,20.3
  Bottom 0.33: MOTORDRIVER.10 48.88,31.1 | 48.88,31.1 48.41,30.63 48.41,20.82 | 48.41,20.82 v48.41,20.3 | 48.41,20.82 48.26,20.34 v48.41,20.3 | 48.41,20.82 48.57,20.34 v48.41,20.3 | 48.88,31.1 49.62,31.24 MOTORDRIVER.10 | 48.88,31.1 49.02,31.84 MOTORDRIVER.10
M1INA  (via drill 0.35)
  Top 0.33: MEGA1.27 49.73,20.25 | 49.73,20.25 49.6,20.25 v49.3,20.55 | 49.73,20.25 49.43,20.65 v49.3,20.55 | 49.73,20.25 49.26,20.39 v49.3,20.55
  Bottom 0.33: v49.3,20.55 49.3,21.07 | 49.3,21.07 49.3,28.32 | 49.3,28.32 49.3,28.98 MOTORDRIVER.9 | 49.3,21.07 49.15,20.6 v49.3,20.55 | 49.3,21.07 49.46,20.6 v49.3,20.55 | 49.3,28.32 49.87,28.82 MOTORDRIVER.9 | 49.3,28.32 49.04,29.03 MOTORDRIVER.9
M1INB  (via drill 0.35)
  Top 0.33: MEGA1.26 50.55,21.05 | 50.55,21.05 50.35,21.05 v50.09,21.31 | 50.55,21.05 50.21,21.42 v50.09,21.31 | 50.55,21.05 50.06,21.15 v50.09,21.31
  Bottom 0.33: v50.09,21.31 50.09,21.84 | 50.09,21.84 50.09,28.04 50.8,28.75 50.8,30.86 51.26,31.32 | 51.26,31.32 51.69,31.75 MOTORDRIVER.8 | 50.09,21.84 49.93,21.36 v50.09,21.31 | 50.09,21.84 50.24,21.36 v50.09,21.31 | 51.26,31.32 52.01,31.23 MOTORDRIVER.8 | 51.26,31.32 51.61,31.99 MOTORDRIVER.8
M1PWM  (via drill 0.35)
  Top 0.33: MEGA1.10 58.92,17.05 57.98,17.99 | v57.94,18.52 57.94,18.03 57.98,17.99 | MOTORDRIVER.7 52.07,28.3 | 52.07,28.3 52.07,27.94 54.61,25.4 55.35,25.4 | 55.35,25.4 v55.88,25.4 | 55.35,25.4 55.83,25.25 v55.88,25.4 | 55.35,25.4 55.83,25.55 v55.88,25.4 | 57.98,17.99 58.09,18.48 v57.94,18.52 | 57.98,17.99 57.79,18.46 v57.94,18.52 | 52.07,28.3 52.5,28.91 MOTORDRIVER.7 | 52.07,28.3 51.64,28.91 MOTORDRIVER.7
  Bottom 0.33: v55.88,25.4 56.25,25.03 | 56.25,25.03 57.94,23.34 57.94,19.04 | 57.94,19.04 v57.94,18.52 | 56.25,25.03 56.02,25.47 v55.88,25.4 | 56.25,25.03 55.81,25.25 v55.88,25.4 | 57.94,19.04 57.78,18.57 v57.94,18.52 | 57.94,19.04 58.09,18.57 v57.94,18.52
M2CS  (via drill 0.35)
  Top 0.33: MEGA2.25 64.03,22.11 | 64.03,22.11 63.51,22.63 v63.65,22.48 | 64.03,22.11 63.8,22.55 v63.65,22.48 | 64.03,22.11 63.58,22.33 v63.65,22.48
  Bottom 0.33: v63.65,22.48 63.28,22.85 | 63.28,22.85 59.69,26.44 59.69,28.3 | 59.69,28.3 MOTORDRIVER.1 | 63.28,22.85 63.51,22.41 v63.65,22.48 | 63.28,22.85 63.73,22.62 v63.65,22.48 | 59.69,28.3 60.12,28.91 MOTORDRIVER.1 | 59.69,28.3 59.26,28.91 MOTORDRIVER.1
M2EN  (via drill 0.35)
  Top 0.33: MEGA2.28 63.51,19.45 62.27,20.68 | 62.27,20.68 v61.9,21.06 | 62.27,20.68 62.04,21.13 v61.9,21.06 | 62.27,20.68 61.83,20.91 v61.9,21.06
  Bottom 0.33: v61.9,21.06 61.53,21.43 | 61.53,21.43 54.66,28.3 | 54.66,28.3 54.61,28.35 MOTORDRIVER.5 54.2,28.89 54.66,28.3 | 61.53,21.43 61.76,20.98 v61.9,21.06 | 61.53,21.43 61.97,21.2 v61.9,21.06
M2INA  (via drill 0.35)
  Top 0.33: v65.86,20.24 65.34,20.24 | 65.34,20.24 MEGA2.27 | 65.34,20.24 65.81,20.09 v65.86,20.24 | 65.34,20.24 65.81,20.4 v65.86,20.24
  Bottom 0.33: 56.5,31.1 56.13,30.73 56.13,27.89 62.46,21.57 62.46,21.41 63.63,20.24 65.34,20.24 | 56.5,31.1 MOTORDRIVER.4 | 65.34,20.24 v65.86,20.24 | 65.34,20.24 65.81,20.09 v65.86,20.24 | 65.34,20.24 65.81,20.4 v65.86,20.24 | 56.5,31.1 57.24,31.24 MOTORDRIVER.4 | 56.5,31.1 56.64,31.84 MOTORDRIVER.4
M2INB  (via drill 0.35)
  Top 0.33: v63.02,21.89 63.22,21.69 63.22,21.41 | 63.22,21.41 63.22,21.13 63.3,21.05 MEGA2.26 | 63.22,21.41 63.18,21.91 v63.02,21.89 | 63.22,21.41 62.9,21.79 v63.02,21.89
  Bottom 0.33: 57.8,28.56 58.42,27.94 58.42,26.62 62.72,22.32 | 57.8,28.56 MOTORDRIVER.3 | 62.72,22.32 63.02,22.02 v63.02,21.89 | 62.72,22.32 62.86,21.85 v63.02,21.89 | 62.72,22.32 63.12,22.03 v63.02,21.89 | 57.8,28.56 57.66,29.3 MOTORDRIVER.3 | 57.8,28.56 57.06,28.7 MOTORDRIVER.3
M2PWM  (via drill 0.35)
  Top 0.33: v63.63,23.52 64,23.15 | 64,23.15 64.52,22.63 65,22.63 70.58,17.05 MEGA2.10 | 64,23.15 63.77,23.59 v63.63,23.52 | 64,23.15 63.55,23.38 v63.63,23.52
  Bottom 0.33: MOTORDRIVER.2 60.34,31.1 | 60.34,31.1 60.96,30.48 60.96,26.14 63.23,23.87 | 63.23,23.87 63.58,23.52 v63.63,23.52 | 63.23,23.87 63.49,23.44 v63.63,23.52 | 63.23,23.87 63.69,23.67 v63.63,23.52 | 60.34,31.1 60.2,31.84 MOTORDRIVER.2 | 60.34,31.1 59.6,31.24 MOTORDRIVER.2
MISO-M  (via drill 0.35)
  Top 0.33: SPI-SW.2 69.28,25.84 | 69.28,25.84 69.9,25.22 72.47,25.22 73.15,24.54 73.15,22.13 MEGA2.16 | 65.08,25.4 62.38,25.4 62.15,25.17 62.15,23.83 MEGA1.16 58.63,21.85 57.65,20.87 | 65.08,25.4 v65.61,25.4 | v32.61,16.18 32.09,16.18 | 32.09,16.18 29.62,16.18 29.01,15.57 29.01,14.25 28.55,13.79 25.98,13.79 25.64,14.13 IC1.11 | 57.65,20.87 v57.28,20.5 | 65.08,25.4 65.56,25.25 v65.61,25.4 | 65.08,25.4 65.56,25.55 v65.61,25.4 | 32.09,16.18 32.56,16.03 v32.61,16.18 | 32.09,16.18 32.56,16.33 v32.61,16.18 | 57.65,20.87 57.2,20.64 v57.28,20.5 | 57.65,20.87 57.42,20.42 v57.28,20.5 | 69.28,25.84 69.14,26.51 SPI-SW.2 | 69.28,25.84 68.62,25.98 SPI-SW.2
  Bottom 0.33: v65.61,25.4 66.13,25.4 | 66.13,25.4 66.57,25.4 67.59,26.42 67.89,26.42 | 67.89,26.42 SPI-SW.2 | v32.61,16.18 32.64,16.21 33.14,16.21 | 33.14,16.21 41.12,16.21 43.74,18.82 55.6,18.82 56.91,20.13 | v57.28,20.5 56.91,20.13 | 66.13,25.4 65.66,25.55 v65.61,25.4 | 66.13,25.4 65.66,25.25 v65.61,25.4 | 33.14,16.21 32.66,16.34 v32.61,16.18 | 33.14,16.21 32.67,16.03 v32.61,16.18 | 56.91,20.13 57.35,20.35 v57.28,20.5 | 56.91,20.13 57.13,20.57 v57.28,20.5 | 67.89,26.42 68.46,26.04 SPI-SW.2 | 67.89,26.42 68.46,26.79 SPI-SW.2
MISO-X
  Top 0.33: U1.21 72.58,32.88 72.14,32.44 69.22,32.44 68.71,32.94 68.71,33.22 | 68.71,33.22 SPI-SW.5 | 68.71,33.22 69.08,33.79 SPI-SW.5 | 68.71,33.22 68.33,33.79 SPI-SW.5
MISOD
  Top 0.33: U1.31 88.08,43.49 90.93,40.64 93.37,40.64 93.75,40.26 | 93.75,40.26 93.98,40.03 TO-UNDER.15 | 93.75,40.26 93.49,39.55 TO-UNDER.15 | 93.75,40.26 94.32,39.76 TO-UNDER.15
MISOF  (via drill 0.35)
  Top 0.33: U1.51 74.58,64.4 77.5,67.31 77.5,69.83 78.79,71.12 78.81,71.12 | 78.81,71.12 SPI-R.P$4 | U2.2 67.94,61.39 68.58,62.03 68.58,68.4 71.27,71.09 73.24,71.09 | 73.24,71.09 v73.76,71.09 | 73.24,71.09 73.71,70.94 v73.76,71.09 | 73.24,71.09 73.71,71.25 v73.76,71.09 | 78.81,71.12 79.56,70.54 SPI-R.P$4 | 78.81,71.12 79.56,71.7 SPI-R.P$4
  Bottom 0.33: SPI-R.P$4 79.93,71.12 79.91,71.09 78.81,71.09 | v73.76,71.09 74.29,71.09 | 74.29,71.09 78.81,71.09 | 74.29,71.09 73.81,71.25 v73.76,71.09 | 74.29,71.09 73.81,70.94 v73.76,71.09 | 78.81,71.09 79.57,70.53 SPI-R.P$4 | 78.81,71.09 79.55,71.69 SPI-R.P$4
MOSI-M  (via drill 0.35, 0.45)
  Top 0.33: SPI-SW.3 72.06,26.42 | 72.06,26.42 72.44,26.42 74.68,24.18 74.68,21.41 74.31,21.05 MEGA2.15 | IC1.10 24.99,16.61 25.17,16.79 31.6,16.79 33.83,19.03 41.63,19.03 | v42.24,19.3 41.96,19.03 41.63,19.03 | v55.75,20.07 56.28,20.07 | 56.28,20.07 56.49,20.07 56.79,19.76 57.58,19.76 58.87,21.05 MEGA1.15 60.98,21.05 62.74,22.81 62.74,24.43 62.97,24.66 66.64,24.66 | v67.16,24.71 67.11,24.66 66.64,24.66 | 41.63,19.03 42.26,19.09 v42.24,19.3 | 41.63,19.03 42.1,19.46 v42.24,19.3 | 56.28,20.07 55.8,20.22 v55.75,20.07 | 56.28,20.07 55.8,19.91 v55.75,20.07 | 66.64,24.66 67.12,24.56 v67.16,24.71 | 66.64,24.66 67.09,24.86 v67.16,24.71 | 72.06,26.42 71.49,26.79 SPI-SW.3 | 72.06,26.42 71.49,26.04 SPI-SW.3
  Bottom 0.33: 70.43,26.42 SPI-SW.3 | 70.43,26.42 69.04,25.02 67.58,25.02 | v42.24,19.3 42.91,19.3 | 42.91,19.3 54.99,19.3 55.38,19.7 | 55.38,19.7 v55.75,20.07 | 67.58,25.02 67.46,25.02 v67.16,24.71 | 42.91,19.3 42.31,19.51 v42.24,19.3 | 42.91,19.3 42.31,19.1 v42.24,19.3 | 55.38,19.7 55.83,19.92 v55.75,20.07 | 55.38,19.7 55.61,20.14 v55.75,20.07 | 67.58,25.02 67.11,24.87 v67.16,24.71 | 67.58,25.02 67.29,24.62 v67.16,24.71 | 70.43,26.42 71,26.04 SPI-SW.3 | 70.43,26.42 71,26.79 SPI-SW.3
MOSI-X
  Top 0.33: U1.20 72.08,34.87 71.82,34.61 | 71.82,34.61 SPI-SW.4 | 71.82,34.61 71.16,34.47 SPI-SW.4 | 71.82,34.61 71.68,33.95 SPI-SW.4
MOSID
  Top 0.33: U1.30 87.82,42.99 90.79,40.02 | 90.79,40.02 TO-UNDER.16 | 90.79,40.02 90.93,39.28 TO-UNDER.16 | 90.79,40.02 91.53,39.88 TO-UNDER.16
MOSIF  (via drill 0.35)
  Top 0.33: SPI-R.P$3 78.81,73.66 | 78.81,73.66 78.74,73.66 73.66,68.58 71.12,68.58 70.48,67.95 U2.5 | U1.50 78.39,52.99 82.18,56.78 | 82.18,56.78 v82.55,57.15 | 82.18,56.78 82.62,57 v82.55,57.15 | 82.18,56.78 82.41,57.22 v82.55,57.15 | 78.81,73.66 79.56,73.08 SPI-R.P$3 | 78.81,73.66 79.56,74.24 SPI-R.P$3
  Bottom 0.33: 81.21,73.66 82.19,73.66 82.55,73.3 82.55,57.67 | 81.21,73.66 SPI-R.P$3 | v82.55,57.15 82.55,57.67 | 82.55,57.67 82.4,57.2 v82.55,57.15 | 82.55,57.67 82.7,57.2 v82.55,57.15 | 81.21,73.66 80.46,74.24 SPI-R.P$3 | 81.21,73.66 80.46,73.08 SPI-R.P$3
MV1
  Top 0.33: U1.27 85.08,41.49 91.06,35.51 93.5,35.51 93.82,35.19 | TO-UNDER.19 93.98,35.03 93.82,35.19 | 93.82,35.19 93.51,34.5 TO-UNDER.19 | 93.82,35.19 94.35,34.66 TO-UNDER.19
MV2
  Top 0.33: U1.28 86.28,41.99 90.79,37.48 | 90.79,37.48 TO-UNDER.18 | 90.79,37.48 90.93,36.74 TO-UNDER.18 | 90.79,37.48 91.53,37.34 TO-UNDER.18
MV3
  Top 0.33: U1.29 86.62,42.49 91.03,38.07 93.47,38.07 93.82,37.73 | TO-UNDER.17 93.98,37.57 93.82,37.73 | 93.82,37.73 93.51,37.04 TO-UNDER.17 | 93.82,37.73 94.35,37.2 TO-UNDER.17
MVS1  (via drill 0.35)
  Top 0.33: U1.70 65.08,53.96 | 65.08,53.96 v65.08,53.44 | 65.08,53.96 64.93,53.49 v65.08,53.44 | 65.08,53.96 65.23,53.49 v65.08,53.44
  Bottom 0.33: 93.68,56.29 93.24,55.85 89.81,55.85 86.89,52.93 65.58,52.93 65.45,53.06 | 93.68,56.29 93.98,56.59 TO-UNDER.1 | v65.08,53.44 65.45,53.06 | 65.45,53.06 65.22,53.51 v65.08,53.44 | 65.45,53.06 65.01,53.29 v65.08,53.44 | 93.68,56.29 94.28,56.73 TO-UNDER.1 | 93.68,56.29 93.48,57.01 TO-UNDER.1
MVS2  (via drill 0.45)
  Top 0.33: U1.71 64.58,55.82 | 64.58,55.82 64.58,56.12 64.87,56.41 v64.9,56.41 64.69,56.45 64.58,55.82
  Bottom 0.33: v64.9,56.41 65.57,56.41 | 65.57,56.41 90.7,56.41 90.79,56.5 | 90.79,56.5 TO-UNDER.2 | 65.57,56.41 64.96,56.61 v64.9,56.41 | 65.57,56.41 64.96,56.21 v64.9,56.41 | 90.79,56.5 91.53,56.64 TO-UNDER.2 | 90.79,56.5 90.93,57.24 TO-UNDER.2
MVS3  (via drill 0.35)
  Top 0.33: U1.72 64.08,53.4 | 64.08,53.4 64.08,53.14 64.29,52.93 v64.31,52.93 | 64.08,53.4 64.15,52.91 v64.31,52.93 | 64.08,53.4 64.43,53.05 v64.31,52.93
  Bottom 0.33: 93.98,53.7 93.98,53.52 93.83,53.36 90.19,53.36 89.24,52.41 64.83,52.41 64.68,52.56 | 93.98,53.7 TO-UNDER.3 | v64.31,52.93 64.68,52.56 | 64.68,52.56 64.46,53.01 v64.31,52.93 | 64.68,52.56 64.24,52.79 v64.31,52.93 | 93.98,53.7 94.41,54.31 TO-UNDER.3 | 93.98,53.7 93.55,54.31 TO-UNDER.3
N$1
  Top 0.33: U1.75 59.15,58.42 50.8,58.42 48.84,60.38 | 48.84,60.38 IC2.4 | 48.84,60.38 48.7,61.05 IC2.4 | 48.84,60.38 48.17,60.52 IC2.4
N$3
  Top 1.27: SP-RC1.1 SP-RC1.2
  Bottom 1.016: SP-RC1.1 SP-R1.2
N$4
  Top 0.33: IC2.3 49.07,58.42 | 49.07,58.42 49.53,58.42 50.8,57.15 57.15,57.15 60.58,53.72 U1.76 | 49.07,58.42 48.5,58.79 IC2.3 | 49.07,58.42 48.5,58.05 IC2.3
N$5
  Top 1.27: Q5.S Q3.S
  Bottom 1.016: SP-R6.2 15.24,71.12 16.51,72.39 Q5.S
N$6
  Top 1.524: Q4.D 9.53,42.54 8.89,41.91 8.89,38.1 7.08,36.29 U$2.1
N$7
  Top 1.27: SP-RC2.1 SP-RC2.2
  Bottom 1.27: SP-RC2.1 SP-R3.2
N$8
  Top 1.016: Q4.G 11.43,39.88 11.43,33.02 12.7,31.75 13.97,31.75 15.24,30.48 M-SW.2
N$9
  Top 1.016: 5VREG.6 52.07,96.27 52.83,95.5 52.83,91.44 54.1,90.17 SP-RC1.3
N$10
  Top 1.016: M-SW.1 17.78,33.02 16.85,33.95 SP-R5.1
N$11
  Top 1.016: S2.2 68.3,84.58 67.13,85.75 61.09,85.75 59.69,84.35 VOLTAGE-METER2.P$1
N$12
  Top 0.33: IC2.2 49.07,55.88 | 49.07,55.88 55.88,55.88 59.27,52.49 U1.77 | 49.07,55.88 48.5,56.25 IC2.2 | 49.07,55.88 48.5,55.51 IC2.2
N$13
  Top 1.27: 3.3REG.6 33.27,96.27 34.29,95.25 34.29,91.44 35.56,90.17 SP-RC2.3
N$14
  Top 0.33: U1.78 58.5,51.99 57.15,53.34 49.07,53.34 | 49.07,53.34 IC2.1 | 49.07,53.34 48.5,53.71 IC2.1 | 49.07,53.34 48.5,52.97 IC2.1
N$15  (via drill 0.9)
  Top 1.016: 3.3REG.1 26.92,85.33 v30.65,81.6 SP-SW2.2
  Top 1.27: SP-R4.1 21.91,80.06 v23.34,80.06
  Bottom 1.27: v23.34,80.06 29.11,80.06 v30.65,81.6
N$16
  Top 1.016: IC2.16 J1.P$2 STEPINDI1.C
N$17
  Top 1.016: STEPINDI2.C J1.P$3 IC2.15
N$18
  Top 1.016: IC2.14 J1.P$4 STEPINDI3.C
N$19
  Top 1.016: STEPINDI4.C J1.P$5 IC2.13
N$20
  Top 1.016: INDILED4.1 STEPINDI4.A
N$21
  Top 1.016: INDILED3.1 STEPINDI3.A
N$22
  Top 1.016: INDILED2.1 STEPINDI2.A
N$23
  Top 1.016: INDILED1.1 STEPINDI1.A
N$24
  Top 1.016: SL-R1.2 SP-LED.C
N$26  (via drill 0.9)
  Top 1.016: SP-SW2.1 35.99,78.8 35.99,79.83 | 35.99,79.83 35.43,80.39 SP-R2.1 | v44.96,86.77 45.31,87.12 5VREG.1 | v37.85,79.85 36.01,79.85 35.99,79.83
  Bottom 1.016: 39.83,81.69 43.2,85.06 44.91,86.77 v44.96,86.77 | 39.83,81.69 | 39.83,81.69 37.99,79.85 v37.85,79.85
N$27  (via drill 3.2 pad 6.45)
  other vias: 94.66,93.76
N$28  (via drill 3.2 pad 6.45)
  other vias: 4.49,93.76
N$29  (via drill 3.2 pad 6.45)
  other vias: 4.49,4.86
N$30  (via drill 3.2 pad 6.45)
  other vias: 94.66,4.86
N$31
  Top 0.61: MEGA2.7 70.58,12.24 | 70.58,12.24 70.58,11.5 Q2.1 | 70.58,12.24 70.36,11.52 Q2.1 | 70.58,12.24 70.92,11.57 Q2.1
N$33
  Top 0.61: MEGA2.8 71.38,14.38 arc90 72.65,13.11 74.28,13.11 arc-45 75.17,12.73 75.65,12.26 75.65,12.24 | 75.65,12.24 Q2.3 | 75.65,12.24 75.37,11.54 Q2.3 | 75.65,12.24 75.94,11.54 Q2.3
N$36
  Top 0.61: MEGA1.7 57.88,12.24 | 57.88,12.24 57.88,11.5 arc90 Q1.1 | 57.88,12.24 57.66,11.52 Q1.1 | 57.88,12.24 58.22,11.57 Q1.1
N$37
  Top 0.61: MEGA1.8 58.68,14.4 arc90 59.95,13.13 61.68,13.13 arc-90 62.95,11.86 Q1.3 | Q1.3 62.66,11.52 62.89,12.24 63.23,11.56 Q1.3
N$38
  Top 1.524: SUPPLY9.1 7.59,82.53 8.89,83.82 11.89,83.82 | Q3.D 13.97,81.74 11.89,83.82 | X2.1 11.89,83.82
N$40
  Bottom 1.016: Q5.G arc90 10.58,74.08 SP-R6.1 10.58,66.76 10.73,66.61 | 10.73,66.61 SUOPPLY-SW2.P$1 | MAINSW2.1 9.35,65.23 10.73,66.61
N$42
  Top 1.016: FT232-R9.2 L5.C
N$43
  Top 1.016: L6.C FT232-R8.2
N$44
  Top 0.406: FT232-R14.2 13.97,12.57 14.44,12.1 FT232USBCON.2
N$45  (via drill 0.45)
  Top 0.406: 11.54,12.81 FT-POWERLED.A 11.43,12.95 12.57,14.1 12.57,17.65 13.49,18.57 | 11.54,12.81 13.64,10.71 FT232USBCON.1 | FT232-R10.2 9.2,12.81 11.54,12.81 | IC1.20 24.34,21.42 24,21.08 23.03,21.08 | 23.03,21.08 v22.35,21.08 | v13.97,19.05 13.49,18.57 | 23.03,21.08 22.4,21.25 v22.35,21.08 | 23.03,21.08 22.4,20.91 v22.35,21.08 | 13.49,18.57 14.06,18.9 v13.97,19.05 | 13.49,18.57 13.82,19.14 v13.97,19.05
  Bottom 0.406: v22.35,21.08 21.68,21.08 | 21.68,21.08 16,21.08 14.45,19.53 | 14.45,19.53 v13.97,19.05 | 21.68,21.08 22.31,20.91 v22.35,21.08 | 21.68,21.08 22.31,21.25 v22.35,21.08 | 14.45,19.53 13.88,19.2 v13.97,19.05 | 14.45,19.53 14.12,18.96 v13.97,19.05
N$46
  Bottom 0.33: ERROR1-R.2 52.07,61.42 | 52.07,61.42 L3.K | 52.07,61.42 52.44,61.99 L3.K | 52.07,61.42 51.7,61.99 L3.K
N$47
  Bottom 0.33: L4.K 52.07,53.8 | 52.07,53.8 ERROR2-R.2 | 52.07,53.8 52.44,54.37 L4.K | 52.07,53.8 51.7,54.37 L4.K
N$48